# EAGLE board v20_panelized (EAGLE 9.6.2)
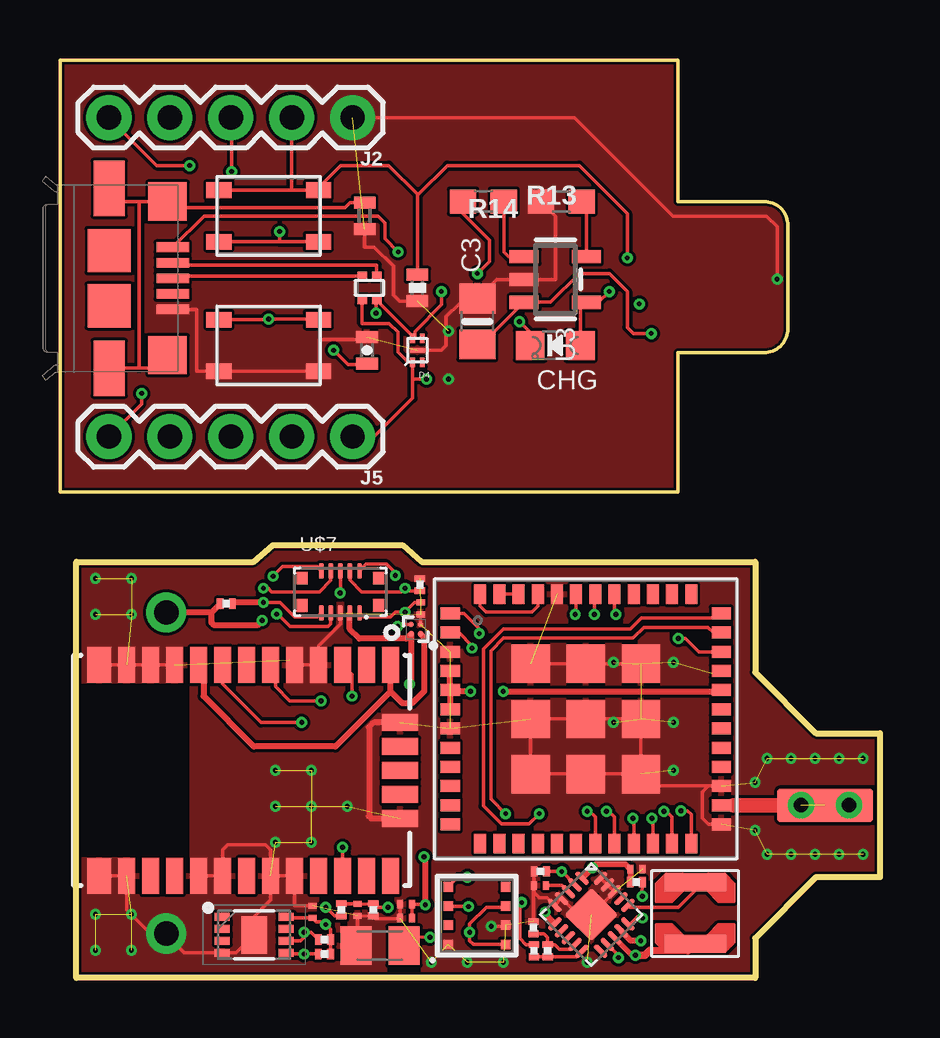
[diagram p0: board, top side]
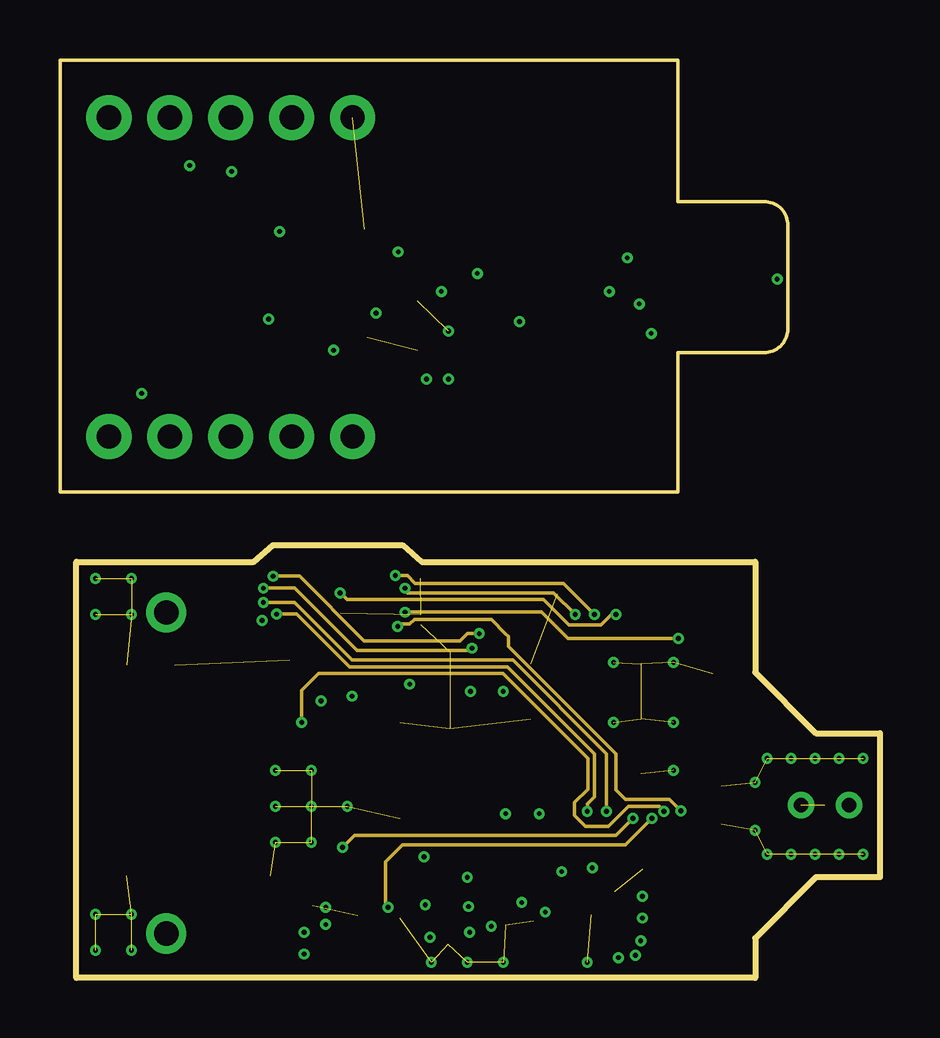
[diagram p1: board, inner layer Route2]
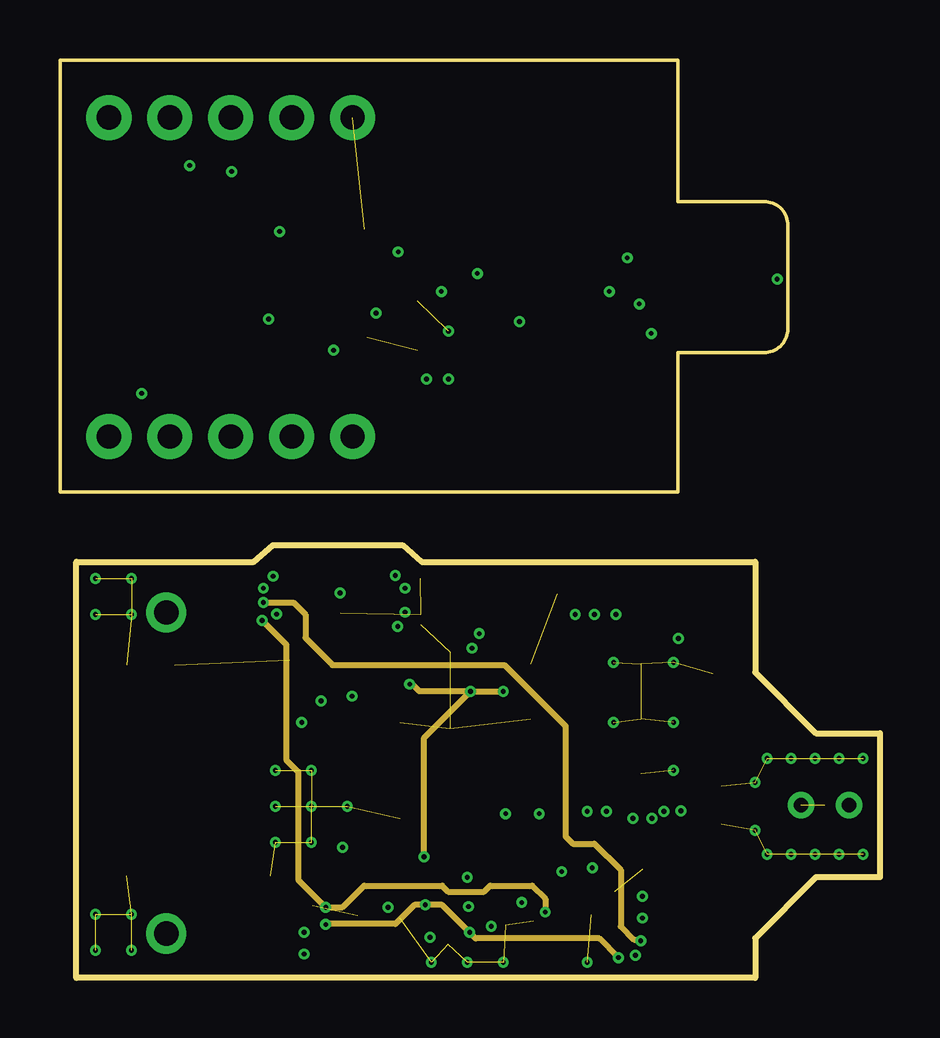
[diagram p2: board, inner layer Route15]
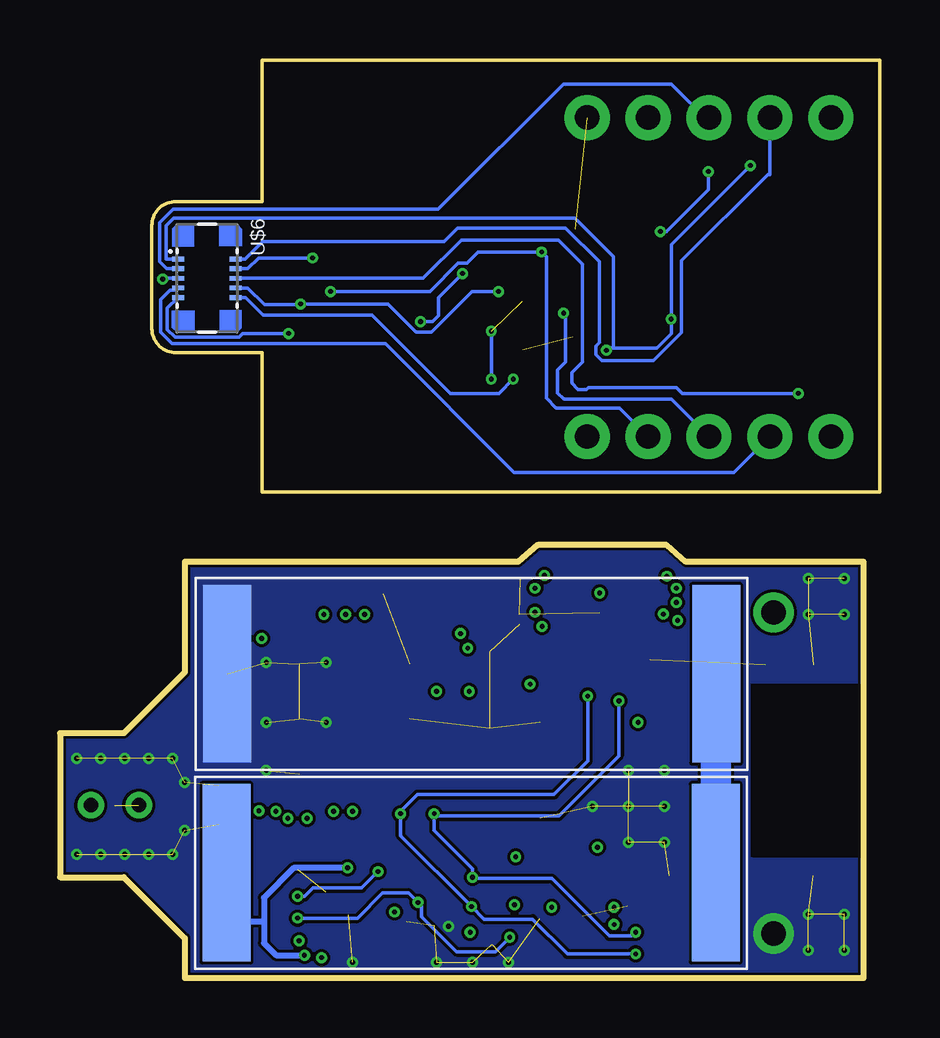
[diagram p3: board, bottom side, seen from below]

Size 34.18 x 38.27 mm. Coordinates in mm from the lower left corner, seen from the top.
Outline: 28.98,17.35 28.98,12.74 31.52,10.2 34.18,10.2 34.18,4.2 31.52,4.2 28.98,1.66 28.98,0 0.68,0 0.68,17.35 8.08,17.35 8.88,18.05 14.28,18.05 15.08,17.35 28.98,17.35
Outline: 0,20.27 0,38.27 25.75,38.27 25.75,32.37 29.35,32.37 arc-90 30.35,31.37 30.35,27.07 arc-90 29.35,26.07 25.75,26.07 25.75,20.27 0,20.27
Copper layers (1*2+15*16): Top 0.035mm / dielectric 0.08mm / Route2 0.035mm / dielectric 0.08mm / Route15 0.035mm / dielectric 0.11mm / Bottom 0.035mm
Design rules "4-layer_0.4mm": minimum track width 5mil, minimum drill 0.2mm, track to track 5mil, track to pad 5mil, pad to pad 5mil, via to via 5mil, smd to smd 5mil, copper to edge 4mil, drill to drill 4mil, minimum pad ring 10mil, minimum via ring 5mil, stop-mask expansion 0mil, vias tented up to drill 20mil, thermal gap 0mil
Net classes: 1 power: width 0.152 mm; 2 antenna: width 0.61 mm, clearance 0.254 mm; 3 battery: width 0.152 mm

## Footprints (pad centres in the part's own frame; a part is rotated, then mirrored left to right if it is on the bottom)
C0201 = smd 0.25 x 0.35: 1 -0.25,0; 2 0.25,0
0805-NO = smd 1.24 x 1.5: 1 -0.95,0; 2 0.95,0
0402-CAP = smd 0.5 x 0.9: 1 -0.55,0; 2 0.55,0
C0805K = smd 1.3 x 1.6: 1 -1,0; 2 1,0
CHIPLED_0805_NOOUTLINE = smd 1.2 x 1.2: A 0,-1.05; C 0,1.05
USBULC6-2N4 = smd 0.2 x 0.4: P$1 0.2,0.5; P$2 -0.2,0.5; P$3 -0.2,-0.5; P$4 0.2,-0.5 | smd 0.6 x 0.2: P$5 0,0
SON50P300X200X55-9N = smd 0.63 x 0.32: 1 -1.33,0.75; 2 -1.33,0.25; 3 -1.33,-0.25; 4 -1.33,-0.75; 5 1.33,-0.75; 6 1.33,-0.25; 7 1.33,0.25; 8 1.33,0.75 | smd 1.06 x 1.56: 9 0,0
1X01_NO_SILK = drill 1.016 pad 1.676: 1 0,0
1X05 = drill 1.016 pad 1.88: 1 0,0; 2 2.54,0; 3 5.08,0; 4 7.62,0; 5 10.16,0
1981584-1 = smd 0.4 x 1.35: 1 -1.3,4.1; 2 -0.65,4.1; 3 0,4.1; 4 0.65,4.1; 5 1.3,4.1 | smd 1.8 x 1.8: M1 -1.15,1.45; M2 1.15,1.45 | smd 2.3 x 1.3: S1 -3.75,1.45; S2 3.75,1.45 | smd 1.6 x 1.6: S3 -3.2,3.885; S4 3.2,3.885
0402 = smd 0.5 x 0.9: 1 -0.55,0; 2 0.55,0
R0201 = smd 0.28 x 0.43: 1 -0.255,0; 2 0.255,0
0402-RES = smd 0.5 x 0.9: 1 -0.55,0; 2 0.55,0
0603-NO = smd 1.1 x 1: 1 -0.85,0; 2 0.85,0
EXB24V = smd 0.4 x 0.36: P$1 -0.3,0.5; P$2 0.3,0.5; P$3 -0.3,-0.5; P$4 0.3,-0.5
TYPEABZ = smd 0.8 x 0.5: P$1 -5.65,4.4; P$2 -5.65,3.6; P$3 -5.65,2.8; P$4 -5.65,2; P$5 -5.65,1.2; P$6 -5.65,0.4; P$7 -5.65,-0.4; P$8 -5.65,-1.2; P$9 -5.65,-2; P$10 -5.65,-2.8; P$11 -5.65,-3.6; P$12 -5.65,-4.4; P$25 5.65,-4.4; P$26 5.65,-3.6; P$27 5.65,-2.8; P$28 5.65,-2; P$29 5.65,-1.2; P$30 5.65,-0.4; P$31 5.65,0.4; P$32 5.65,1.2; P$33 5.65,2; P$34 5.65,2.8; P$35 5.65,3.6; P$36 5.65,4.4 | smd 0.5 x 0.8: P$13 -4.4,-5.2; P$14 -3.6,-5.2; P$15 -2.8,-5.2; P$16 -2,-5.2; P$17 -1.2,-5.2; P$18 -0.4,-5.2; P$19 0.4,-5.2; P$20 1.2,-5.2; P$21 2,-5.2; P$22 2.8,-5.2; P$23 3.6,-5.2; P$24 4.4,-5.2; P$37 4.4,5.2; P$38 3.6,5.2; P$39 2.8,5.2; P$40 2,5.2; P$41 1.2,5.2; P$42 0.4,5.2; P$43 -0.4,5.2; P$44 -1.2,5.2; P$45 -2,5.2; P$46 -2.8,5.2; P$47 -3.6,5.2; P$48 -4.4,5.2 | smd 1.6 x 1.6: P$49 -2.3,2.3; P$50 0,2.3; P$51 2.3,2.3; P$52 -2.3,0; P$53 0,0; P$54 2.3,0; P$55 -2.3,-2.3; P$56 0,-2.3; P$57 2.3,-2.3
SOT23-5 = smd 0.55 x 1.2: 1 -0.95,-1.3; 2 0,-1.3; 3 0.95,-1.3; 4 0.95,1.3; 5 -0.95,1.3
SPV1050 = smd 0.7 x 0.2: P$1 -1.35,0.8; P$2 -1.35,0.4; P$3 -1.35,0; P$4 -1.35,-0.4; P$5 -1.35,-0.8; P$11 1.35,-0.8; P$12 1.35,-0.4; P$13 1.35,0; P$14 1.35,0.4; P$15 1.35,0.8 | smd 0.2 x 0.7: P$6 -0.8,-1.35; P$7 -0.4,-1.35; P$8 0,-1.35; P$9 0.4,-1.35; P$10 0.8,-1.35; P$16 0.8,1.35; P$17 0.4,1.35; P$18 0,1.35; P$19 -0.4,1.35; P$20 -0.8,1.35 | smd 1.6 x 1.6: P$21 0,0
LGA3.0X3.0 = smd 0.4 x 0.4: 1 1.2,1.2; 2 1.2,0.4; 3 1.2,-0.4; 4 1.2,-1.2; 5 -1.2,-1.2; 6 -1.2,-0.4; 7 -1.2,0.4; 8 -1.2,1.2
TPS22916 = smd 0.23 x 0.23: A1 -0.254,0.254; A2 0.144,0.254; B1 -0.254,-0.144; B2 0.144,-0.144
LPS_3015 = smd 0.75 x 2.54: P$1 -1.3,0; P$2 1.25,0
ICARUS_NITINOL_ANTENNA_SHORT = smd 4 x 1.4: 1 0,0 | drill 0.6: 2 -1,0; 3 1,0
KXOB25-05X3F = smd 7.4 x 2: P$1 0,10.2; P$2 0,-10.2
CAM-M8 = smd 0.7 x 1.5: 1 -6.2,-4.4; 2 -5.2,-4.4; 3 -4.2,-4.4; 4 -3.2,-4.4; 5 -2.2,-4.4; 6 -1.2,-4.4; 7 -0.2,-4.4; 8 0.8,-4.4; 9 1.8,-4.4; 10 2.8,-4.4; 11 3.8,-4.4; 12 4.8,-4.4; 15 4.8,4.4; 16 3.8,4.4; 17 2.8,4.4; 18 1.8,4.4; 19 0.8,4.4; 20 -0.2,4.4; 21 -1.2,4.4; 22 -2.2,4.4; 23 -3.2,4.4; 24 -4.2,4.4; 25 -5.2,4.4; 26 -6.2,4.4 | smd 1 x 1.5: 13 5.95,-4.4; 14 5.95,4.4 | smd 1.5 x 0.7: 27 -6.6,2; 28 -6.6,1; 29 -6.6,0; 30 -6.6,-1; 31 -6.6,-2
AXE510127 = smd 0.2 x 0.5: 1 -0.8,-1.2; 2 -0.8,1.2; 3 -0.4,-1.2; 4 -0.4,1.2; 5 0,-1.2; 6 0,1.2; 7 0.4,-1.2; 8 0.4,1.2; 9 0.8,-1.2; 10 0.8,1.2
AXE610124 = smd 0.2 x 0.65: 1 0.81,-0.88; 2 0.81,0.87; 3 0.41,-0.88; 4 0.41,0.87; 5 0.01,-0.88; 6 0.01,0.87; 7 -0.39,-0.88; 8 -0.39,0.87; 9 -0.79,-0.88; 10 -0.79,0.87 | smd 0.45 x 0.53: DNC1 -1.59,0.57; DNC2 -1.59,-0.569; DNC3 1.607,-0.569; DNC4 1.607,0.57
C&KTACTILESWITCH = smd 1.05 x 0.65: P$1 -2.075,1.073; P$2 2.075,1.075; P$3 -2.075,-1.075; P$4 2.075,-1.075

## Placement (x,y rotation side)
C1  0.1 uF  [C0201]  15.04,15.41 270 top
C2  1 uF  [C0201]  10.53,2.75 90 top
C3  10µF  [0805-NO]  17.4,27.37 90 top
C4  10nF  [C0201]  20.01,3.86 180 top
C5  100 nF  [0402-CAP]  12.8,26.17 270 top
C7  0.1 uF  [C0201]  12.4,2.84 270 top
C9  1 uF  [C0201]  14.43,2.5 0 top
C10  0.1 uF  [C0201]  14.43,3.08 0 top
C13  47 uF  [C0805K]  13.34,1.35 180 top
C14  4.7 uF  [C0201]  24.03,4.54 0 top
CHG  ORANGE  [CHIPLED_0805_NOOUTLINE]  20.65,26.37 90 top
D4  USBULC6-2N4  [USBULC6-2N4]  14.9,26.17 180 top
IC4  CAT24M01HU5I-GT3  [SON50P300X200X55-9N]  8.1,1.8 0 top
J1  [1X01_NO_SILK]  4.43,15.24 0 top
J2  [1X05]  12.2,35.87 180 top
J3  [1X01_NO_SILK]  4.43,1.85 0 top
J4  1981584-1  [1981584-1]  0.6,29.17 270 top
J5  [1X05]  12.2,22.57 180 top
L3  BLM15HB121SN1  [0402]  12.7,31.77 270 top
R1  4.7 k  [R0201]  11.03,1 0 top
R2  4.7 k  [R0201]  11.03,1.6 0 top
R3  10k  [R0201]  15.01,16.39 270 top
R4  0  [R0201]  6.93,15.6 180 top
R5  10 K  [0402-RES]  14.9,28.77 90 top
R6  10 M  [R0201]  13.06,2.84 90 top
R7  4.7 M  [R0201]  11.72,2.84 270 top
R8  3M  [R0201]  24.03,4 180 top
R9  9.1M  [R0201]  20.03,4.45 0 top
R10  6.2M  [R0201]  19.76,1.14 90 top
R11  1M  [R0201]  20.33,1.14 270 top
R12  3M  [R0201]  19.74,2.1 270 top
R13  1K  [0603-NO]  17.65,32.37 0 top
R14  10K\  [0603-NO]  20.9,32.37 180 top
RA1  EXB24V  [EXB24V]  12.9,28.77 180 top
U1  TYPEABZ  [TYPEABZ]  21.92,10.8 0 top
U3  MCP73831T-2ACI/OT  [SOT23-5]  20.65,29.12 270 top
U4  SPV1050  [SPV1050]  22.15,2.64 315 top
U5  BME680BME680  [LGA3.0X3.0]  17.38,2.6 180 top
U6  TPS22916  [TPS22916]  14.78,14.6 180 top
U$1  LPS3015  [LPS_3015]  26.48,2.73 90 top
U$2  NITINOL_ANTENNA_SHORT  [ICARUS_NITINOL_ANTENNA_SHORT]  31.89,7.2 0 top
U$3  KXOB25-O5X3F  [KXOB25-05X3F]  17.04,4.39 90 bottom
U$4  CAM-M8  [CAM-M8]  7.58,8.65 180 top
U$5  KXOB25-O5X3F  [KXOB25-05X3F]  17.02,12.68 270 bottom
U$6  AXE510127  [AXE510127]  28.05,29.17 270 bottom
U$7  AXE610124  [AXE610124]  11.68,16.1 0 top
U$8  C&KTACTILESWITCH  [C&KTACTILESWITCH]  8.7,31.77 0 top
U$10  C&KTACTILESWITCH  [C&KTACTILESWITCH]  8.7,26.37 0 top

## Library data of the parts
C1 C2 C4 C7 C9 C10 C13 C14 = rcl; SPICEPREFIX: C
C3 CHG R13 R14 U3 = microbuilder
C5 = SparkFun-Capacitors
D4 RA1 U1 U$8 U$10 = Kris
IC4 = CAT24M01HU5I-GT3-CorrectedV2; ALLIED_NUMBER: 70300250; ALLIED_PRICE-STOCK: http://www.alliedelec.com/on-semiconductor-cat24m01hu5i-gt3/70300250/; DESCRIPTION: EEPROM 1MB I2C SERIAL EEPROM; HEIGHT: 0.55mm; MANUFACTURER_NAME: ON Semiconductor; MANUFACTURER_PART_NUMBER: CAT24M01HU5I-GT3; MOUSER_PART_NUMBER: 863-CAT24M01HU5I-GT3; MOUSER_PRICE-STOCK: https://www.mouser.com/Search/Refine.aspx?Keyword=863-CAT24M01HU5I-GT3; RS_PART_NUMBER: 7814831P; RS_PRICE-STOCK: http://uk.rs-online.com/web/p/products/7814831P
J1-J3 J5 = SparkFun-Connectors
J4 = con-usb; MF: Hirose; MPN: ZX62-AB-5PA(11)
L3 = inductors
R1-R4 R6-R12 = rcl; SPICEPREFIX: R
R5 = SparkFun-Resistors
U4 = STM-SPV1050_V2
U5 = SparkFun-Sensors; PROD_ID: IC-14656
U6 = TPS22916V2; AVAILABILITY: Unavailable; DESCRIPTION: Linear Voltage Regulator IC 1 Output 150mA 4-DSBGA (1x1); MF: Texas Instruments; MP: LP5900TL-3.0; PACKAGE: WFBGA-4 Texas Instruments; PRICE: None
U$1 = coilcraft_custom
U$2 = Antenna_mounts
U$3 U$5 = AnySolar
U$4 = ubloxLib
U$6 U$7 = PanasonicA4SConnectorsV7

## Nets
BAT [battery]: J1.1 R4.2 R7.2 U4.P$6
BOOT: R3.2 U1.P$43 U$7.4
BOOT_C: J2.2 R5.2 U$6.4 U$8.P$1 U$8.P$2
DM: U1.P$2 U$7.8
DM_C: D4.P$4 J5.3 RA1.P$1 U$6.8
DP: U1.P$1 U$7.10
DP_C: D4.P$1 J5.1 RA1.P$2 U$6.10
GND: C1.2 C2.2 C4.2 C7.2 C9.1 C10.1 C13.2 C14.2 IC4.4 IC4.9 J3.1 R3.1 R6.1 R9.1 R12.1 U1.P$3 U1.P$7 U1.P$25 U1.P$27 U1.P$44 U1.P$49 U1.P$50 U1.P$51 U1.P$52 U1.P$53 U1.P$54 U1.P$55 U1.P$56 U1.P$57 U4.P$4 U4.P$5 U4.P$18 U4.P$19 U4.P$20 U4.P$21 U5.1 U5.7 U6.B1 U$4.4 U$4.5 U$4.10 U$4.11 U$4.12 U$4.13 U$4.14 U$4.15 U$4.18 U$4.19 U$4.21 U$4.22 U$4.27 U$4.31 U$5.P$2 U$7.5
GND1: C3.2 C5.1 D4.P$5 J2.1 J4.5 L3.2 R5.1 R14.2 U3.2 U$6.5 U$10.P$3 U$10.P$4
GPS_BCKUP: U1.P$23 U$4.8
GPS_ON: U1.P$24 U6.B2
GPS_PWR: U6.A1 U$4.1 U$4.9
ID: J4.4
N$1: U1.P$45 U1.P$48
N$2: U$3.P$2 U$5.P$1
N$3: CHG.C R13.1
N$4: U4.P$16 U$1.P$2
N$5: R13.2 U3.1
N$6: R8.1 R9.2 U4.P$2
N$7 [battery]: C14.1 R8.2 U4.P$1 U4.P$13 U$1.P$1 U$3.P$1
N$8: R10.1 R11.2 U4.P$10
N$9: R11.1 R12.2 U4.P$9
N$10: R14.1 U3.5
N$11 [antenna]: U1.P$26 U$2.1 U$2.2 U$2.3
N$12: C13.1 R10.2 U4.P$15
N$13: C4.1 U4.P$3
N$31: J4.3 RA1.P$4
N$33: J4.2 RA1.P$3
POWER [power]: C2.1 C9.2 C10.2 IC4.8 R1.2 R2.2 U1.P$4 U1.P$5 U1.P$6 U1.P$32 U4.P$12 U5.6 U5.8 U6.A2 U$7.3
PWR_C: J2.3 U$6.3 U$8.P$3 U$8.P$4
RST: C1.1 U1.P$34 U$7.1
RST_C: C5.2 J2.5 U$6.1 U$10.P$1 U$10.P$2
RX: U1.P$18
SAFEBOOT: U1.P$21 U$4.24
SCL: IC4.6 R2.1 U1.P$35 U5.4 U$4.6
SDA: IC4.5 R1.1 U1.P$36 U5.3 U$4.3
SWDCLK: U1.P$42 U$7.2
SWDCLK_C: J2.4 U$6.2
SWDIO: U1.P$41 U$7.6
SWDIO_C: J5.5 U$6.6
TCXO_OUT: U1.P$46 U1.P$47
TX: U1.P$19 U$7.7
TX_C: J5.4 U$6.7
USB_SHIELD: J4.S1 J4.S2 J4.S3 J4.S4 L3.1
VBUS: R4.1 U1.P$20 U4.P$14 U$7.9
VBUS1: C3.1 U3.3 U$6.9
VBUS_C: CHG.A J4.1 J5.2 U3.4
VOLT_MEAS: C7.1 R6.2 R7.1 U1.P$22

## Tracks (layer width: path | path; a pad name or v marks a point on that pad's centre or on a via)
BAT  (via drill 0.2)
  Top 0.152: R7.2 11.44,2.59 v11.08,2.95 | 20.13,2.75 v20.23,2.75
  Top 0.254: v8.43,14.9 8.23,14.7 6.43,14.7 6.32,14.81 6.32,15.24 | U4.P$6 20.13,2.75 | R4.2 6.32,15.24 | 6.32,15.24 J1.1
  Route15 0.254: v8.43,14.9 9.43,13.9 9.43,9.1 9.93,8.6 9.93,4.1 v11.08,2.95 11.78,2.95 12.68,3.85 15.93,3.85 16.18,3.6 17.68,3.6 17.93,3.85 19.68,3.85 20.23,3.3 v20.23,2.75
BOOT  (via drill 0.2)
  Top 0.152: U1.P$43 21.52,15.19 v21.48,15.15 | U$7.4 12.09,16.59 12.57,16.1 14.23,16.1 v14.38,16.25 14.49,16.14 R3.2
  Route2 0.152: v21.48,15.15 20.58,16.05 14.48,16.05 14.48,16.15 v14.38,16.25
BOOT_C  (via drill 0.2)
  Top 0.152: U$8.P$1 U$8.P$2 | U$8.P$2 9.66,32.85 J2.2 | U$8.P$2 10.78,32.95 11.7,33.87 13.7,33.87 14.9,32.67 | 14.9,32.67 R5.2 | 14.9,32.67 14.95,32.67 16.15,33.87 21.65,33.87 23.65,31.87 v23.65,30.02
  Bottom 0.152: U$6.4 26.35,29.57 25.9,30.02 v23.65,30.02
DM  (via drill 0.2)
  Top 0.152: U1.P$2 16.63,14.4 17.18,13.85 v17.18,13.75 | v8.48,16.25 8.68,16.25 8.83,16.1 10.81,16.1 11.29,16.57 U$7.8
  Route2 0.152: v8.48,16.25 9.78,16.25 12.38,13.65 17.08,13.65 v17.18,13.75
DM_C  (via drill 0.2)
  Top 0.152: v13.18,27.72 13.18,28.25 RA1.P$1 14.7,26.77 D4.P$4 14.8,26.77 14.8,26.95 15.91,28.07 15.91,28.61 v15.9,28.62
  Bottom 0.152: U$6.8 26.35,28.77 25.65,28.07 24.18,28.07 v24.15,28.1 20.5,28.1 19.33,26.94 18.69,26.94 17,28.62 v15.9,28.62 | J5.3 8.69,24.14 13.18,24.14 13.43,24.39 13.43,25.35 13.1,25.68 13.1,27.64 v13.18,27.72
DP  (via drill 0.2)
  Top 0.152: v17.48,14.36 17.48,14.56 16.84,15.2 U1.P$1 | v8.88,16.75 9.28,17.15 10.71,17.15 U$7.10
  Route2 0.152: v17.48,14.36 16.98,14.36 16.68,14.06 12.67,14.06 9.98,16.75 v8.88,16.75
DP_C  (via drill 0.2)
  Top 0.152: RA1.P$2 12.6,27.29 13.73,27.29 14.1,26.92 14.1,26.09 14.51,25.67 D4.P$1 | J5.1 13.1,22.57 14.7,24.17 D4.P$1 | v15.28,24.97 14.7,24.97 D4.P$1
  Bottom 0.152: U$6.10 26.45,28.37 25.72,27.64 24.55,27.64 21.17,27.64 17.9,24.37 15.88,24.37 v15.28,24.97
GND  (via drill 0.2)  (52 unrouted)
  Top 0.152: U4.P$20 U4.P$19 U4.P$18 U4.P$21 21.49,2.64 21.43,2.7 21.43,2.79 U4.P$4 U4.P$5 20.31,3.35 19.98,3.35 19.76,3.56 C4.2 | C4.2 19.76,4.44 R9.1 | U$4.21 U$4.22 9.78,3 C2.2 | U$4.21 8.78,3.25 7.98,2.45 7.98,1.92 IC4.9 7.35,1.05 IC4.4 5.18,1.05 4.38,1.85 | 9.58,13.25 U$4.5 U$4.4 10.78,13.85 11.69,14.76 U$7.5 | C13.2 12.4,1.4 C7.2 12.41,2.57 R6.1 13.16,2.47 14.15,2.47 C9.1 C10.1 | U$4.10 U$4.11 U$4.12 U$4.13 | U$4.14 U$4.15 2.78,2.85 3.78,1.85 4.38,1.85 | U$4.18 U$4.19 6.78,5.35 6.98,5.55 8.58,5.55 8.78,5.35 U$4.21 | 4.38,1.85 J3.1 | U1.P$51 U1.P$50 U1.P$49 | U1.P$52 19.68,10.8 | 19.68,10.8 U1.P$53 U1.P$54 U1.P$57 | U1.P$57 U1.P$56 U1.P$55 19.62,10.74 19.68,10.8 | U6.B1 C1.2 | U1.P$25 27.03,6.4 26.78,6.65 26.78,7.75 27.03,8 U1.P$27 24.72,8 U1.P$57 | U5.7 18.53,2.15 v17.98,2.15 | R12.1 19.74,3.83 C4.2
  Top 0.254: U$4.31 13.08,10.65 12.88,10.45 12.88,6.75 12.98,6.65 U$4.27
  other vias: 10.48,7.15 25.58,10.65 25.58,13.15 33.48,9.15 32.48,9.15 31.48,9.15 30.48,9.15 29.48,9.15 33.48,5.15 32.48,5.15 31.48,5.15 30.48,5.15 29.48,5.15 8.98,7.15 8.98,8.65 10.48,8.65 10.48,5.65 8.98,5.65 11.98,7.15 1.48,2.65 1.48,1.15 2.98,1.15 2.98,2.65 1.48,16.65 1.48,15.15 2.98,15.15 2.98,16.65 18.48,0.65 16.98,0.65 15.48,0.65 21.98,0.65 28.98,6.15 28.98,8.15 23.08,13.15 23.08,10.65 25.58,8.65
  pour Top: -0.18,18.83 34.94,18.83 34.94,-0.4 -0.18,-0.4
  pour Bottom: -0.12,19.25 35.68,19.25 35.68,-1.65 -0.32,-1.65 -0.32,4.95 5.38,4.95 5.38,12.35 -0.12,12.35
GND1  (via drill 0.2)  (3 unrouted)
  Top 0.152: J4.5 5.7,27.87 5.7,25.29 U$10.P$3 U$10.P$4 10.8,25.29 10.8,26.62 12.7,26.62 C5.1 | R5.1 14.15,28.22 13.9,28.47 13.9,29.67 13.1,30.47 12.7,30.47 L3.2 | D4.P$5 15.9,26.17 16.1,26.37 16.1,26.97 | 16.1,26.97 v16.2,26.97 | R14.2 20.65,31.77 20.65,29.12 U3.2 18.2,29.12 C3.2 17.17,28.09 16.62,28.09 16.1,27.57 16.1,26.97 | v29.9,29.14 29.9,31.32 29.45,31.77 25.55,31.77 21.45,35.87 J2.1
  Bottom 0.152: v16.2,26.97 v16.2,24.97 | 29.9,29.17 v29.9,29.14 29.87,29.17 U$6.5
  pour Top: -0.3,20.17 -0.3,38.57 31.15,38.57 31.15,20.17
GPS_BCKUP  (via drill 0.2)
  Top 0.152: U1.P$23 25.52,6.71 25.28,6.95 v25.18,6.95 | v10.08,10.65 8.38,10.65 6.78,12.25 U$4.8
  Route2 0.152: v25.18,6.95 24.98,7.15 23.69,7.15 22.86,6.32 21.9,6.32 21.45,6.77 21.45,7.31 22,7.87 22,9.15 18.46,12.69 10.78,12.69 10.08,11.99 v10.08,10.65
GPS_ON  (via drill 0.2)
  Top 0.152: U1.P$24 26.32,6.81 26.16,6.97 v25.89,6.97 | v14.08,14.65 14.17,14.74 U6.B2
  Route2 0.152: v25.89,6.97 25.4,7.45 23.58,7.45 23.18,7.85 23.18,9.35 18.7,13.83 18.7,14.23 18.58,14.35 17.98,14.95 14.78,14.95 14.58,14.75 14.18,14.75 v14.08,14.65
GPS_PWR
  Top 0.254: U6.A1 15.18,14.2 15.18,11.95 14.68,11.45 14.28,11.45 13.78,11.95 | 13.78,11.95 11.48,9.65 8.08,9.65 5.98,11.75 5.98,13.05 U$4.9 | 13.78,11.95 U$4.1
N$1
  Top 0.152: U1.P$45 19.92,15.5 19.67,15.25 17.77,15.25 17.52,15.5 U1.P$48
N$2
  Bottom 0.152: 6.84,12.66 U$5.P$1
  Bottom 1.27: U$3.P$2 6.84,12.66
N$3  (via drill 0.2)
  Top 0.152: R13.1 16.8,31.87 17.9,30.77 17.9,29.87 v17.4,29.37 | v19.15,27.37 19.6,26.92 CHG.C
  Bottom 0.152: v17.4,29.37 18.4,28.37 18.4,27.62 18.65,27.37 v19.15,27.37
N$4
  Top 0.152: U$1.P$2 26.47,3.63 25.78,2.94 23.75,2.94 U4.P$16
N$5
  Top 0.152: U3.1 18.7,30.07 18.5,30.27 R13.2
N$6  (via drill 0.2)
  Top 0.152: R9.2 v20.92,4.45 v20.92,4.44 U4.P$2 | R8.1 24.25,3.43 v24.28,3.4
  Bottom 0.152: v24.28,3.4 23.98,3.4 23.63,3.75 21.61,3.75 v20.92,4.44
N$7  (via drill 0.2)
  Top 0.152: U$1.P$1 26.18,1.14
  Top 0.203: U4.P$13 23.84,0.95 v23.99,0.95
  Top 0.254: U4.P$1 v22.19,4.59 22.35,4.75 23.57,4.75 C14.1 R8.2
  Top 0.305: v23.99,0.95 24.39,0.95 24.59,1.15 26.18,1.14
  Bottom 0.254: v22.19,4.59 24.44,4.59 25.68,3.35 25.68,2.35 | v23.99,0.95 25.18,0.95 25.68,1.45 25.68,2.35 | 25.68,2.35 27.18,2.35 27.28,2.25 27.28,4.35 U$3.P$1
N$8
  Top 0.152: R10.1 R11.2 21.53,0.89 U4.P$10
N$9
  Top 0.152: U4.P$9 21.28,1.2 20.83,1.2 20.63,1.4 R11.1 20.33,1.7 20.18,1.84 R12.2
N$10
  Top 0.152: U3.5 21.95,32.17 R14.1
N$11  (1 unrouted)
  Top 0.254: U$2.3 U$2.1 30.7,7.2
  Top 0.508: U1.P$26 28.08,7.2
  Top 0.61: 30.7,7.2 28.08,7.2
N$12  (via drill 0.2)
  Top 0.152: U4.P$15 23.78,2.25 24.08,2.55 24.24,2.55 v24.28,2.5 | v15.43,1.7 14.71,1.72 C13.1 | v19.25,3.15 19.25,3.12 19.18,3.05 19.18,1.65 19.43,1.4 R10.2
  Bottom 0.152: v24.28,2.5 21.78,2.5 20.73,3.55 19.65,3.55 v19.25,3.15 19.1,3 19.1,2.55 17.65,1.1 16.03,1.1 v15.43,1.7
N$13
  Top 0.152: C4.1 20.93,3.86 U4.P$3
N$31
  Top 0.152: J4.3 4.8,29.27 RA1.P$4
N$33
  Top 0.152: J4.2 4.8,29.72 13.2,29.72 RA1.P$3
POWER  (via drill 0.2)
  Top 0.152: U4.P$12 23.28,0.94 v23.28,0.85 | IC4.8 9.47,2.5 C2.1 10.68,2.35 11.08,2.35 v11.08,2.23 11.29,2.03 R2.2 R1.2 | 27.52,11.95 U1.P$32 | U1.P$5 16.32,11.95 | C9.2 C10.2 15.2,3.08 v15.23,3.05 | U$7.3 | 14.64,12.31 v14.58,12.25 | U5.6 18.53,2.95 17.78,2.95 17.08,2.25 v17.08,1.9 17.08,1.55 17.23,1.4 U5.8
  Top 0.254: U1.P$6 U1.P$5 U1.P$4 | v18.48,11.95 27.52,11.95 | v17.12,11.95 16.32,11.95 | U$7.3 12.08,14.55 12.48,14.15 14.44,14.15 U6.A2 14.64,12.31 | v15.23,3.05 15.23,5 v15.18,5.05
  Route15 0.152: 14.68,12.25 v14.58,12.25
  Route15 0.254: v17.12,11.95 v18.48,11.95 | v17.12,11.95 14.98,11.95 14.68,12.25 | v15.18,5.05 15.18,10.01 v17.12,11.95 | v23.28,0.85 22.48,1.65 17.33,1.65 v17.08,1.9 15.93,3.05 v15.23,3.05 14.78,3.05 13.98,2.25 11.1,2.25 v11.08,2.23
PWR_C  (via drill 0.2)
  Top 0.152: J2.3 7.15,35.84 v7.15,33.62 | v9.15,31.12 9.15,30.7 | 9.15,30.7 U$8.P$3 | 9.15,30.7 U$8.P$4
  Bottom 0.152: U$6.3 29.74,29.57 30.03,29.85 30.03,31.49 29.47,32.05 18.42,32.05 13.2,37.27 8.7,37.27 7.3,35.87 J2.3 | v7.15,33.62 7.15,32.87 8.9,31.12 v9.15,31.12
RST  (via drill 0.2)
  Top 0.152: U1.P$34 26.63,13.6 26.08,14.15 v25.78,14.15 | C1.1 14.79,15.66 v14.38,15.25 13.98,15.25 13.78,15.05 12.66,15.05 U$7.1
  Route2 0.152: v25.78,14.15 21.18,14.15 20.08,15.25 v14.38,15.25
RST_C  (via drill 0.2)
  Top 0.152: J2.5 4.04,33.87 v5.4,33.87 | U$10.P$2 10.75,27.47 v8.7,27.47 8.67,27.44 U$10.P$1 | C5.2 12.75,25.57 12,25.57 v11.4,26.17
  Bottom 0.152: v5.4,33.87 8.7,30.57 v8.7,27.47 8.7,26.87 9.3,26.27 11.1,26.27 | v11.4,26.17 11.3,26.27 11.1,26.27 | U$6.1 29.75,29.97 29.75,31.37 29.45,31.67 12.71,31.67 11.1,30.07 11.1,26.27
SAFEBOOT  (via drill 0.2)
  Top 0.152: U1.P$21 23.92,6.65 v23.88,6.65 | v11.78,5.45 U$4.24
  Route2 0.152: v23.88,6.65 23.18,5.95 12.28,5.95 v11.78,5.45
SCL  (via drill 0.2)
  Top 0.152: v16.98,4.2 16.58,4.2 U5.4 | v10.88,11.55 9.58,11.55 8.98,12.15 8.98,12.85 U$4.6 | U1.P$35 27.23,14.4 27.01,14.62 24.35,14.62 23.9,14.17 18.5,14.17 17.96,13.63 17.96,7.47 v18.58,6.85 | R2.1 10.47,1.9 v10.18,1.9 10.18,1.7 10.03,1.55 IC4.6
  Bottom 0.152: v10.88,11.55 10.88,9.25 13.38,6.75 18.38,6.75 18.48,6.85 v18.58,6.85 18.58,6.15 16.98,4.55 v16.98,4.2 16.93,4.15 13.68,4.15 11.28,1.75 10.33,1.75 v10.18,1.9
SDA  (via drill 0.2)
  Top 0.152: IC4.5 9.48,1.1 9.58,1 v10.18,1 R1.1 | v17.03,2.98 16.2,2.98 U5.3 | v12.18,11.75 12.18,12.65 U$4.3 | U1.P$36 27.37,15 24.23,15 23.78,14.55 18.48,14.55 17.65,13.72 17.65,7.17 18.4,6.42 19.55,6.42 v19.98,6.85
  Bottom 0.152: v12.18,11.75 12.18,9.05 13.58,7.65 19.28,7.65 19.98,6.95 v19.98,6.85 19.98,5.93 v17.03,2.98 16.5,2.45 14.48,2.45 13.03,1 v10.18,1
SWDCLK  (via drill 0.2)
  Top 0.152: U1.P$42 22.28,15.96 v22.28,15.15 | v13.98,16.78 13.98,16.88 13.61,17.25 12.77,17.25 U$7.2
  Route2 0.152: v22.28,15.15 20.98,16.45 14.81,16.45 14.48,16.78 v13.98,16.78
SWDCLK_C
  Bottom 0.152: U$6.2 26.46,29.97 25.73,30.7 18.17,30.7 17.6,31.27 13.11,31.27 11.7,29.86 11.7,26.48 11.83,26.35 11.83,25.99 11.58,25.74 9.44,25.74 8.27,26.91 8.27,29.9 4.68,33.49 4.58,33.49 J2.4
SWDIO  (via drill 0.2)
  Top 0.152: v23.18,15.15 23.12,15.21 U1.P$41 | v11.68,16.05 11.7,16.07 11.7,16.43 11.69,16.44 U$7.6
  Route2 0.152: v23.18,15.15 22.99,15.15 22.56,14.72 21.21,14.72 20.16,15.77 11.96,15.77 v11.68,16.05
SWDIO_C  (via drill 0.2)
  Top 0.152: J5.5 3.4,23.93 v3.4,24.37
  Bottom 0.152: v3.4,24.37 8.22,24.37 8.47,24.62 12.14,24.62 12.22,24.54 12.58,24.54 12.83,24.79 12.83,25.25 12.4,25.68 12.4,29.77 13.4,30.77 17.45,30.77 19.05,29.17 U$6.6
TCXO_OUT
  Top 0.152: U1.P$46 U1.P$47
TX  (via drill 0.2)
  Top 0.152: U1.P$19 22.32,6.71 22.08,6.95 v21.98,6.95 | v9.03,15.17 9.08,15.17 9.6,14.65 11.18,14.65 11.29,14.76 U$7.7
  Route2 0.152: v21.98,6.95 21.98,7.25 22.28,7.55 22.28,9.35 18.66,12.97 12.06,12.97 9.87,15.17 v9.03,15.17
TX_C
  Bottom 0.152: U$6.7 29.35,28.67 29.58,28.67 29.98,28.27 29.98,26.92 29.5,26.44 20.62,26.44 15.25,21.07 6.08,21.07 J5.4
USB_SHIELD
  Top 0.152: J4.S4 4.49,25.42 3.3,25.42 | 3.3,25.42 J4.S2 | 3.3,32.37 J4.S3 4.74,32.11 11.88,32.11 12.09,32.32 L3.1 | 3.3,32.37 2.05,32.37 J4.S1 | 3.3,32.37 3.3,25.42
VBUS  (via drill 0.2)
  Top 0.152: U1.P$20 23.12,6.71 22.88,6.95 v22.78,6.95 | v8.48,15.65 9.18,15.65 9.78,15.05 10.72,15.05 U$7.9
  Top 0.254: v24.21,1.56 23.8,1.56 U4.P$14 | R4.1 7.24,15.65 v8.48,15.65
  Route2 0.152: v8.48,15.65 9.78,15.65 12.18,13.25 18.88,13.25 22.78,9.35 v22.78,6.95
  Route15 0.254: v24.21,1.56 24.17,1.6 23.93,1.6 23.38,2.15 23.38,4.5 22.28,5.6 21.38,5.6 21.08,5.9 21.08,10.5 18.53,13.05 11.36,13.05 10.23,14.18 10.23,15.15 9.73,15.65 v8.48,15.65
VBUS1  (via drill 0.2)
  Top 0.152: C3.1 17.6,26.42 U3.3 20.45,28.17 21.65,29.37 22.9,29.37 23.65,28.62 23.65,27.12 23.9,26.87 v24.65,26.87
  Bottom 0.152: v24.65,26.87 26.56,26.87 26.72,26.72 29.38,26.72 29.7,27.04 29.7,27.92 U$6.9
VBUS_C  (via drill 0.2)
  Top 0.152: J4.1 6,31.77 13.25,31.77 13.55,31.47 13.55,30.82 v14.1,30.27 | CHG.A 21.7,27.92 U3.4 22.45,28.17 v22.9,28.62
  Bottom 0.152: J5.2 10.86,23.77 13.5,23.77 13.9,24.17 13.9,30.07 v14.1,30.27 16.75,30.27 17.22,29.8 17.58,29.8 18.76,28.62 v22.9,28.62
VOLT_MEAS  (via drill 0.2)
  Top 0.152: U1.P$22 24.72,6.49 24.68,6.52 v24.68,6.65 | R7.1 12.38,3.1 C7.1 13.05,3.08 R6.2 13.2,2.95 v13.68,2.95
  Route2 0.152: v24.68,6.65 23.58,5.55 14.28,5.55 13.58,4.85 13.58,2.95 v13.68,2.95

## Text on the board
tValues: + | -